# Altium PCB PDS.PcbDoc
Units mil, origin at the board's own origin, x right, y up, seen from the top; angles counter-clockwise.
Board outline 1968.5 x 1929.13 mil, 4 copper layers (L1 (Sig), L2 (GDN), L3 (GDN), L4 (Sig)), stack 59.734 mil thick; 33 components, 27 nets, 121 pads, 33 vias.
Unrouted connection lines stored in the file: 25.
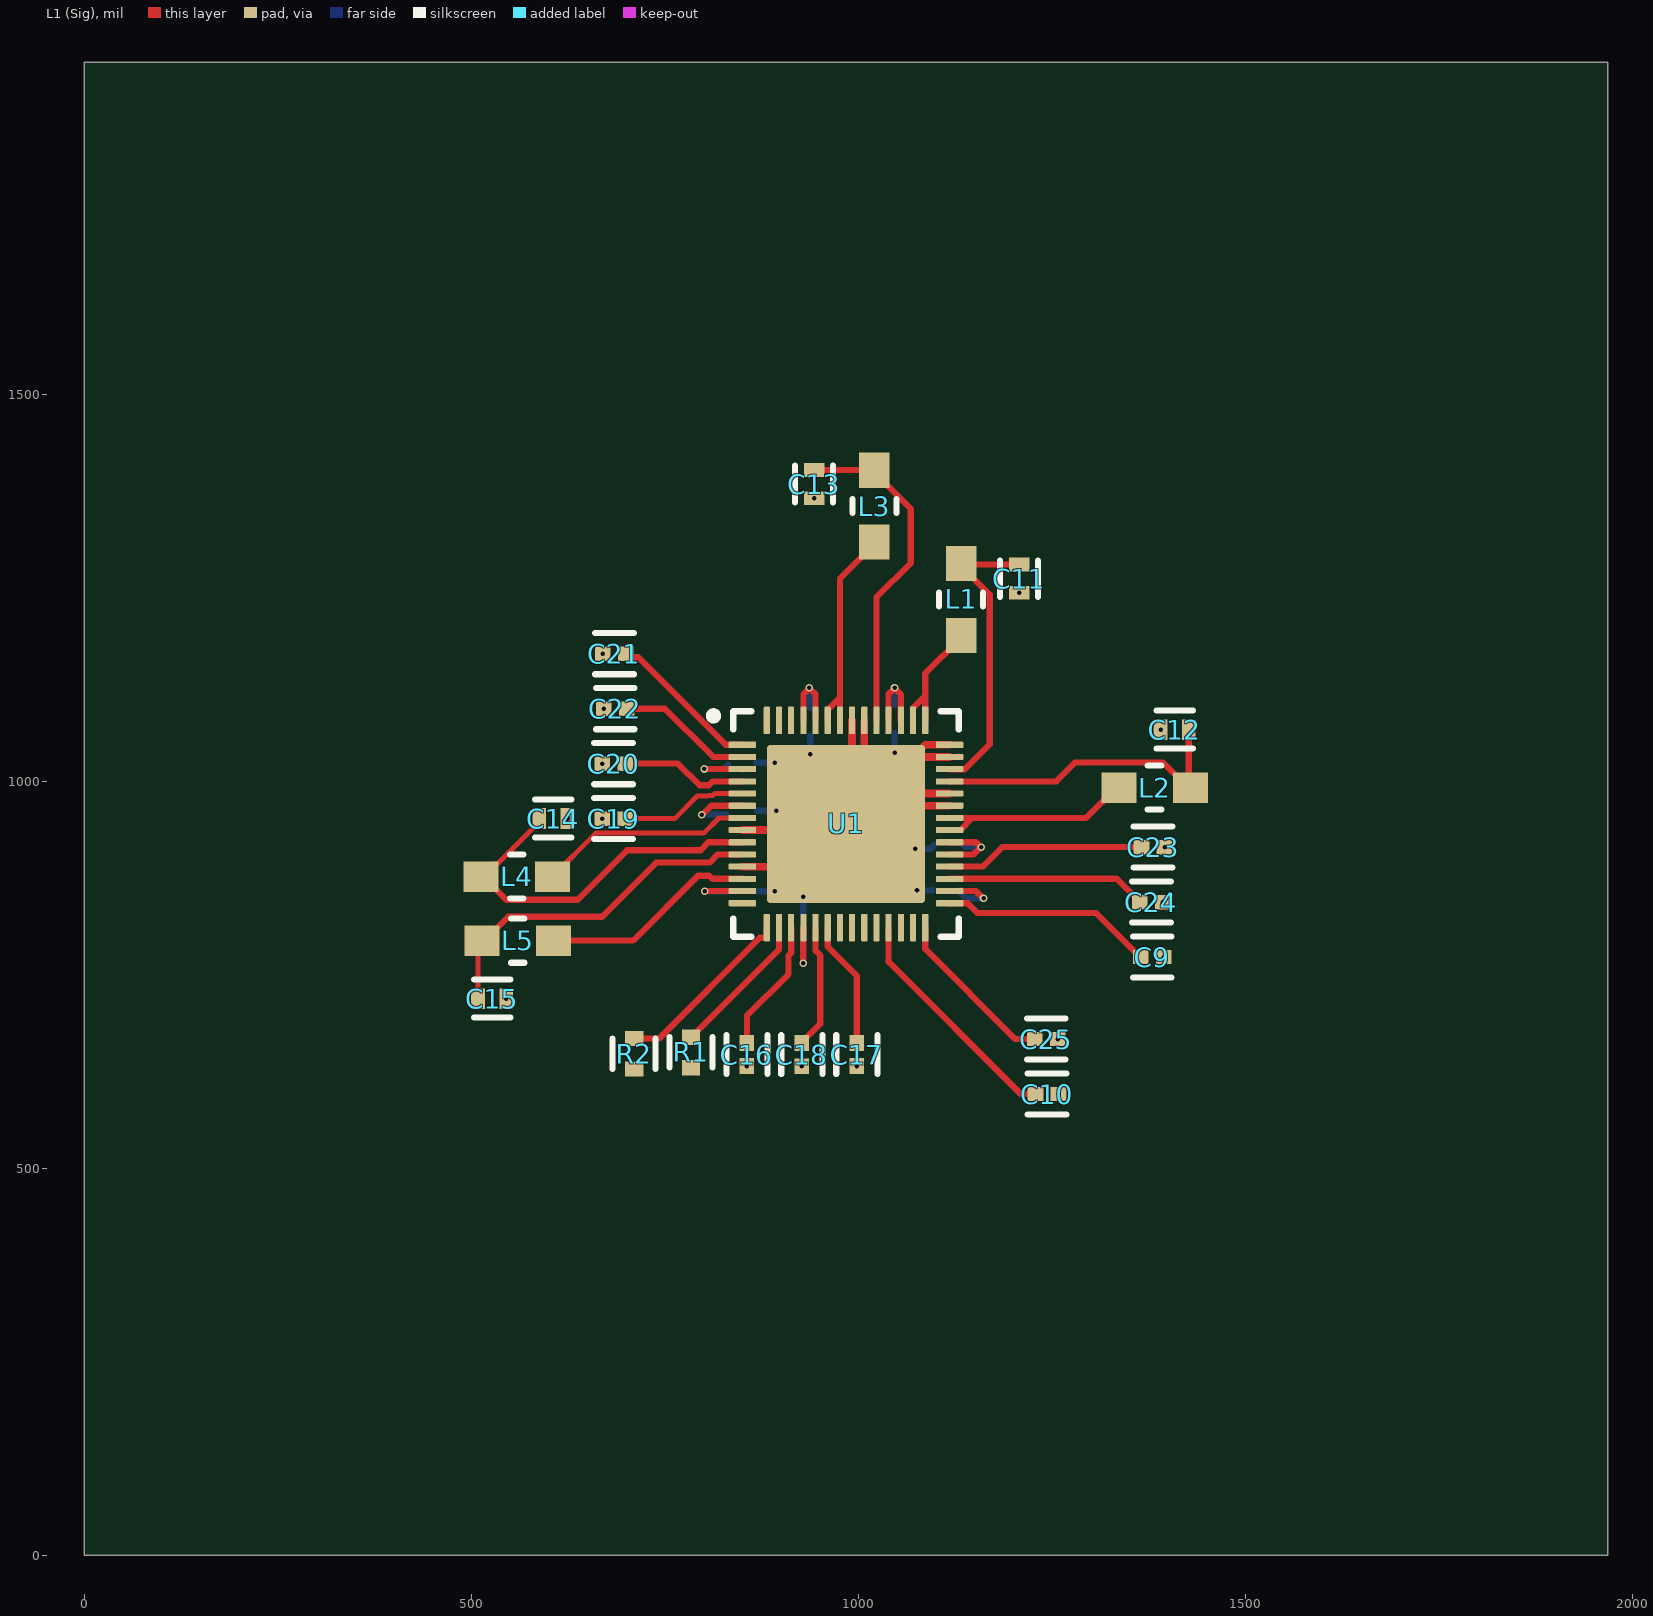
[diagram p0: L1 (Sig) view]
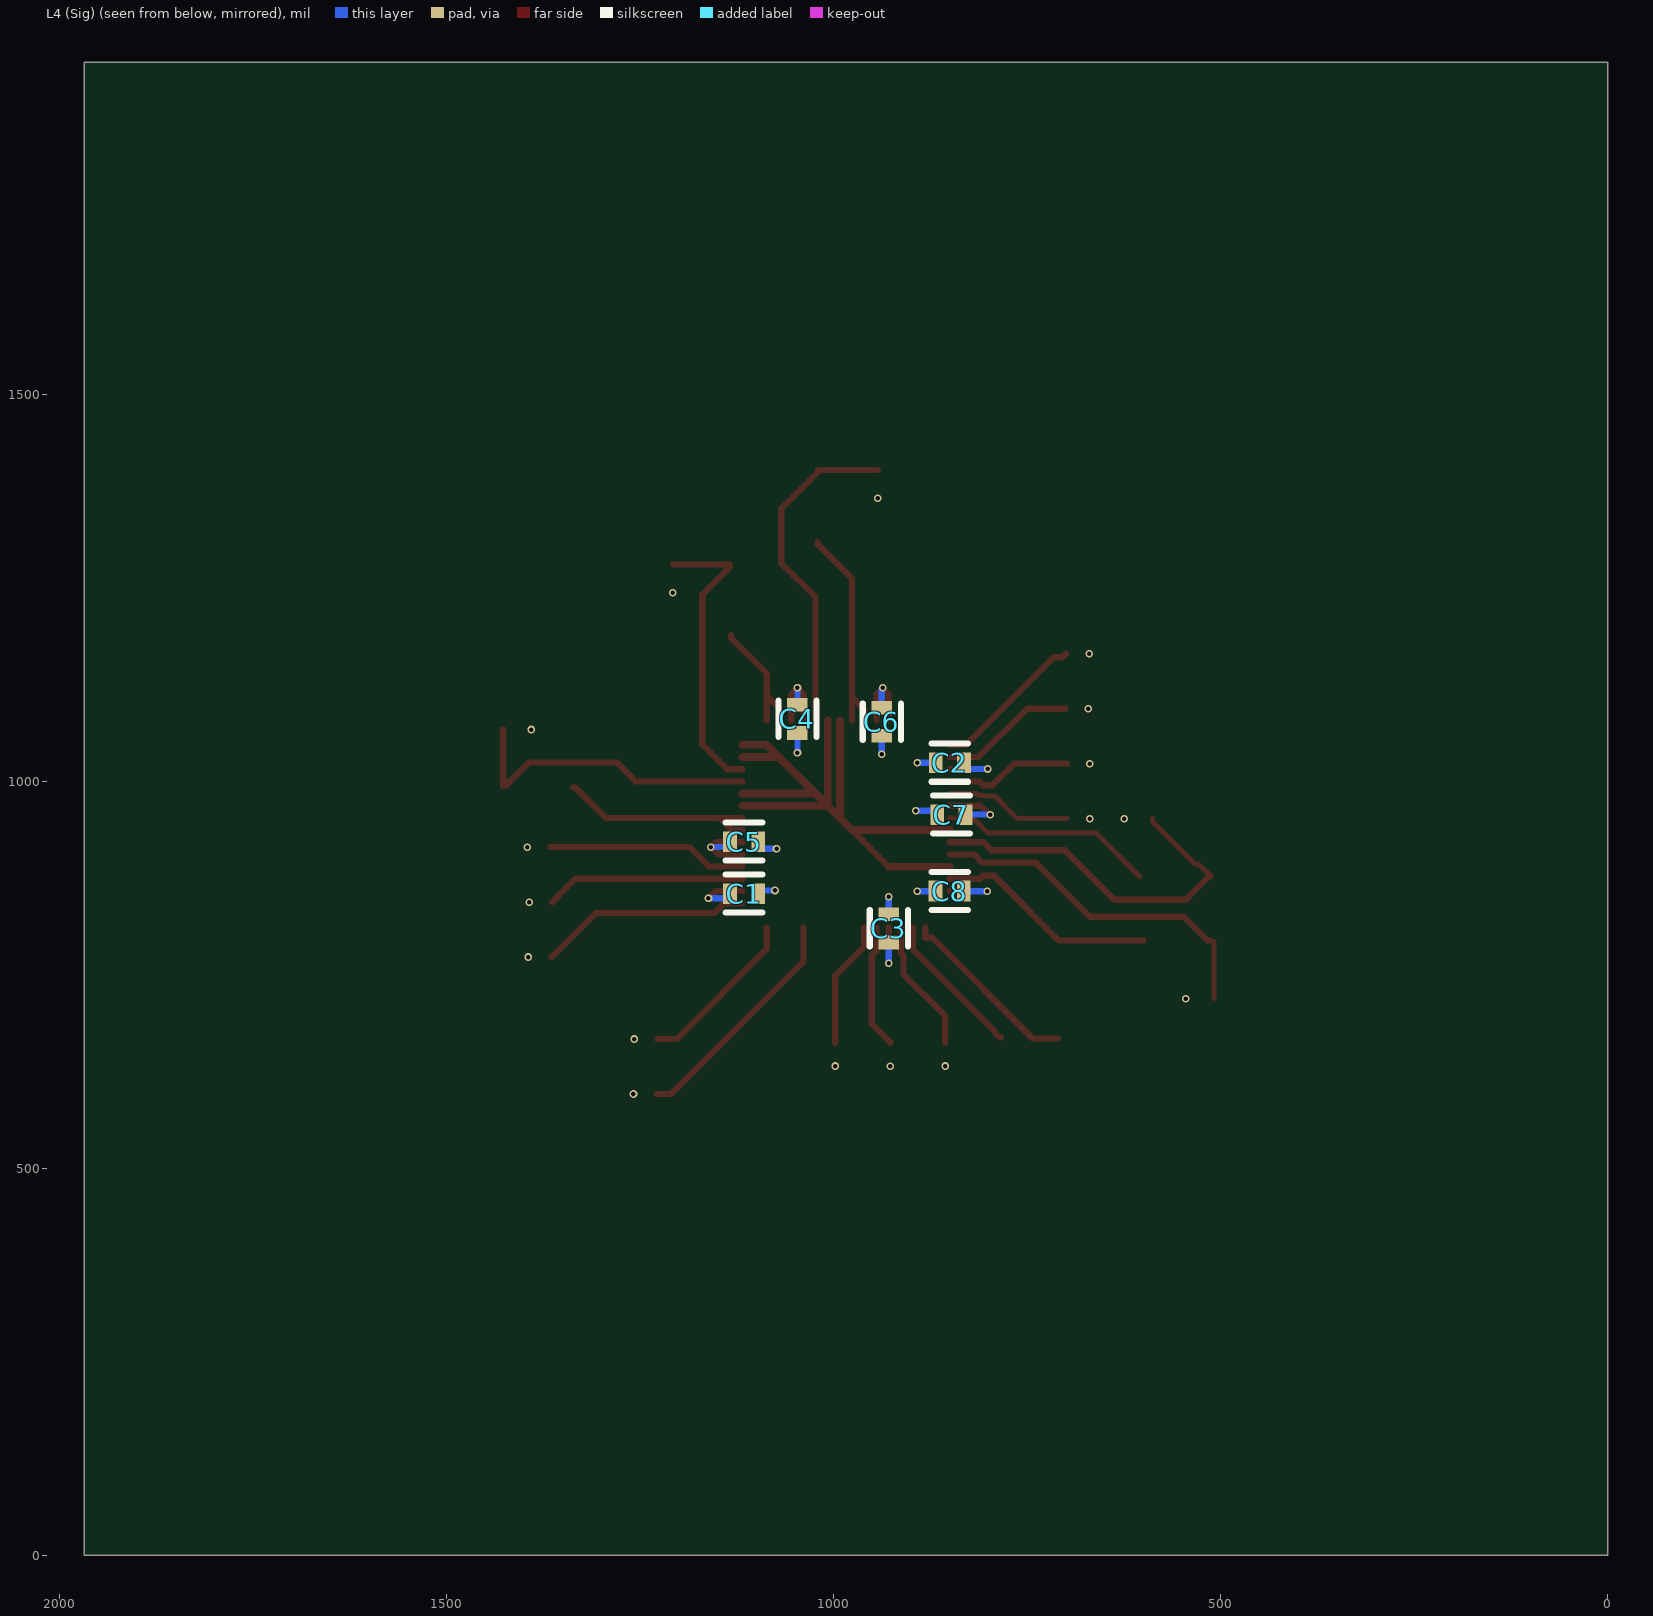
[diagram p1: L4 (Sig) view, seen from below]
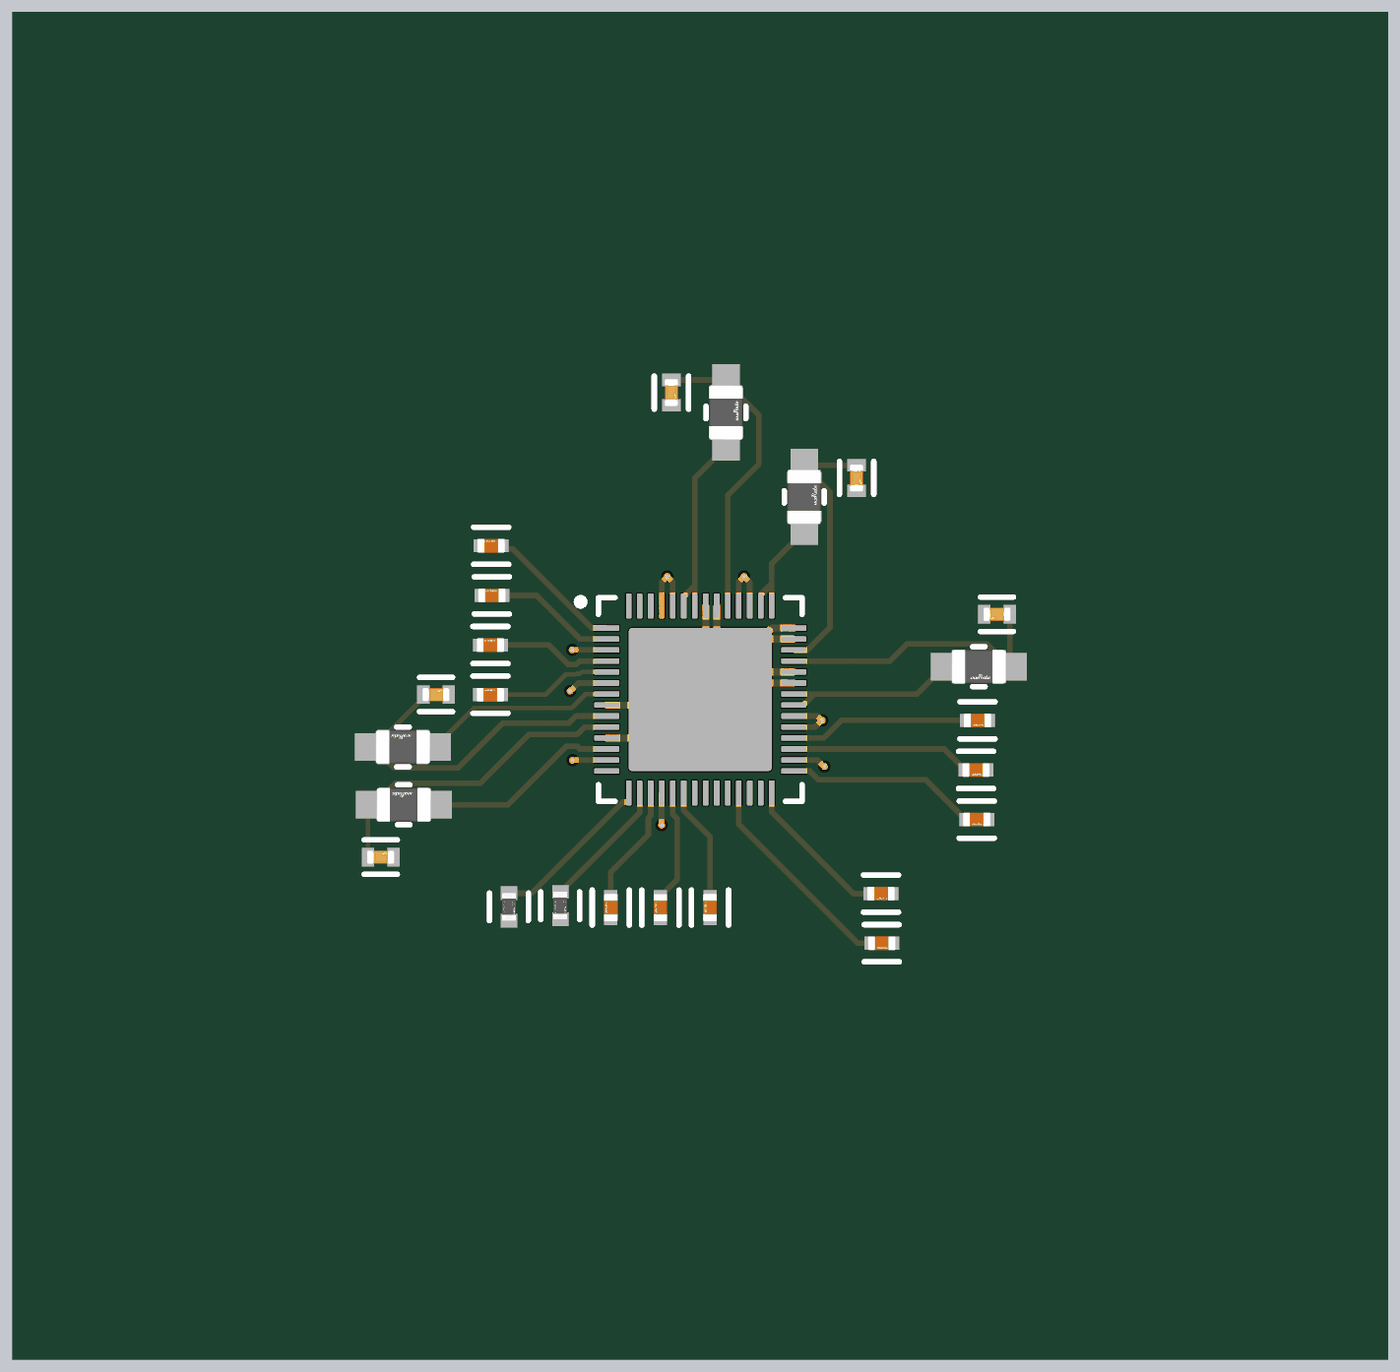
[diagram p2: 3D render of the assembled board from above, using the file's embedded part models]
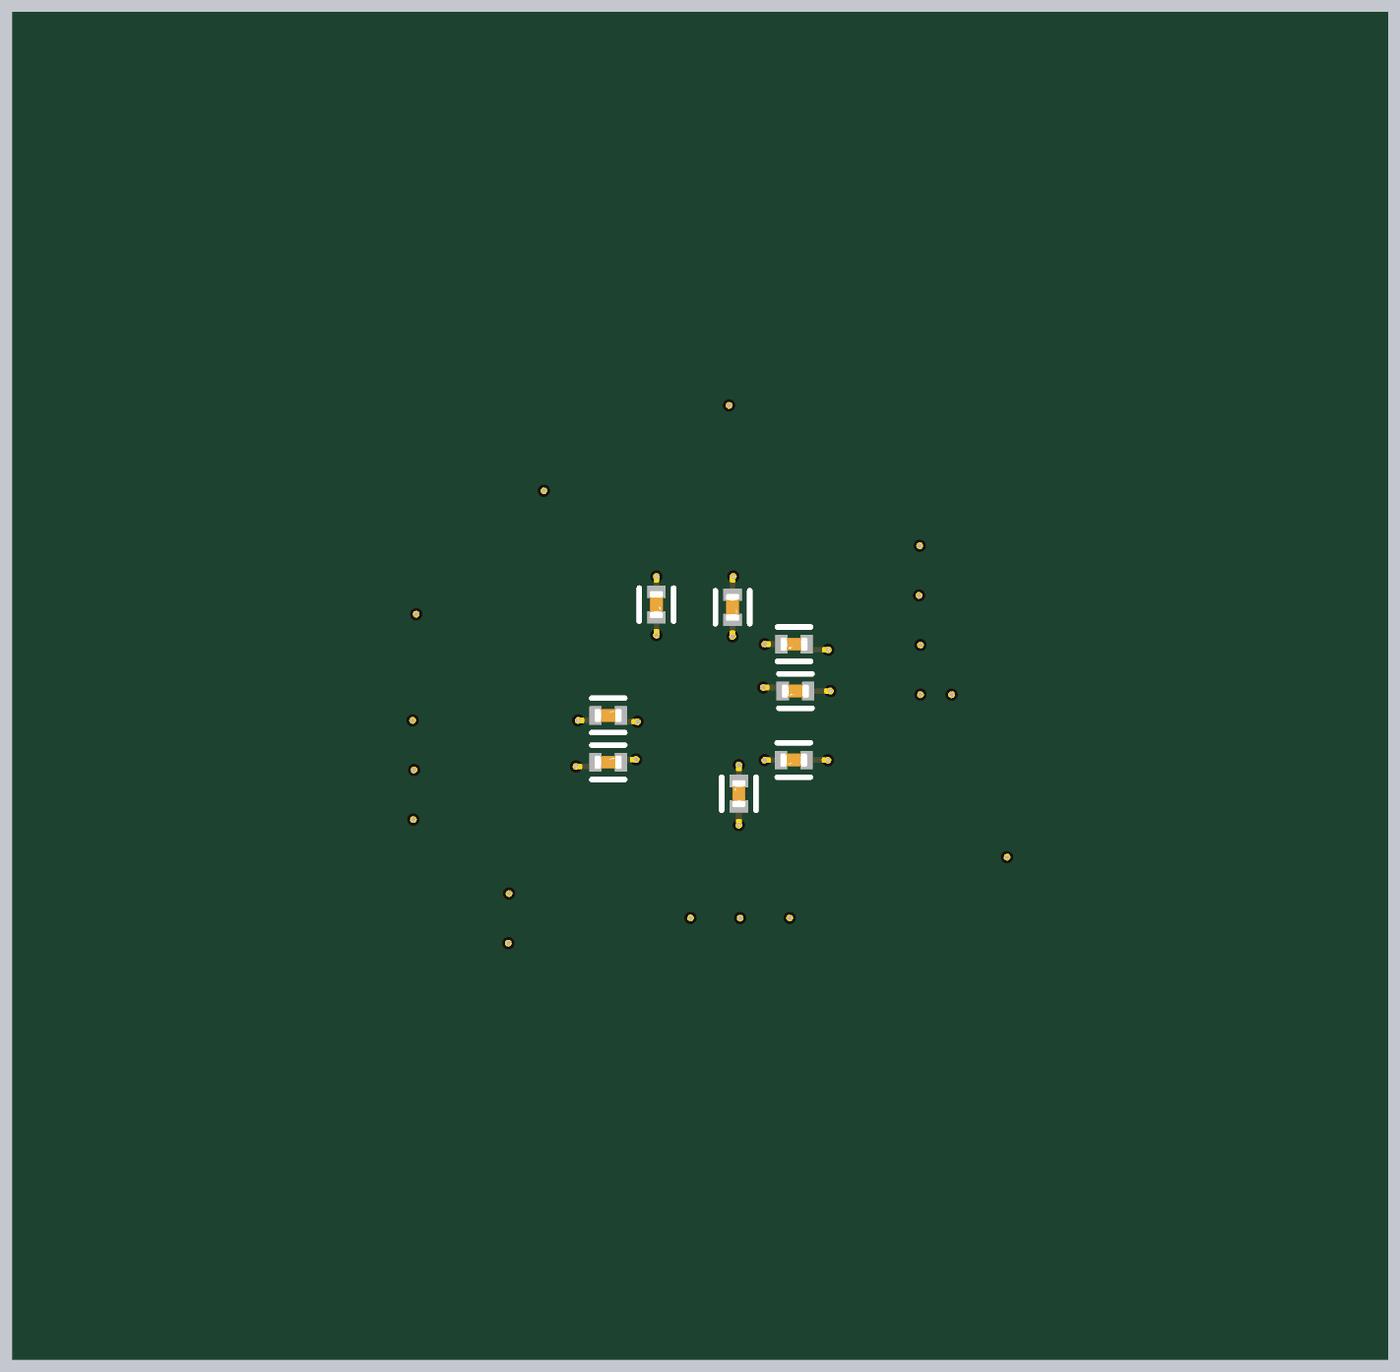
[diagram p3: 3D render of the assembled board from below, using the file's embedded part models]

## Layer stack, top to bottom
Top Solder: solder mask 1, SM-001, Dk 4
L1 (Sig): signal copper 1.378
Dielectric 1: prepreg 2.8, PP-006, Dk 4.1
L2 (GDN): signal copper 0.689
Dielectric 3: core 50, Core-039, Dk 4.8
L3 (GDN): signal copper 0.689
Dielectric 5: prepreg 2.8, PP-006, Dk 4.1
L4 (Sig): signal copper 1.378
Bottom Solder: solder mask 1, SM-001, Dk 4

## Board outline
0,0 0,1929.13 1968.5,1929.13 1968.5,0

## Design rules (kind name [scope] priority, off if disabled: settings)
Clearance [All] p1: gap=10 ignorepadtopadclearanceinfootprint=FALSE except(0: Arc-Hole Track-Hole SMDPad-Hole THPad-Hole Via-Hole Fill-Hole Poly-Hole Region-Hole Text-Hole; 6: Arc-Arc Arc-Track Arc-SMDPad Track-Track Track-SMDPad SMDPad-SMDPad)
PolygonConnect [All] p1: connectstyle=Relief reliefconductorwidth=10 reliefentries=4 polygonreliefangle="90 Angle" airgapwidth=10
RoutingVias [All] p1: holewidth=5.91 width=9.84 viastyle="Through Hole" minholewidth=5.91 minwidth=9.84 maxholewidth=5.91 maxwidth=9.84
SolderMaskExpansion [All] p1: expansion=4 istentingtop=FALSE
Width [All] p1: maxlimit=30 minlimit=6.5 preferedwidth=8
30 further rules are at their usual default settings.

## Components (designator, comment, footprint, x,y, rotation, side; value= is the part's Value field where it differs from the comment)
C1 "CL05A106MP5NUNC" FP-CL05A106MP5NUNC-MFG 1116,855 r180 bottom value=10uF
C2 "CL05A106MP5NUNC" FP-CL05A106MP5NUNC-MFG 850,1024.1 r0 bottom value=10uF
C3 "CL05A106MP5NUNC" FP-CL05A106MP5NUNC-MFG 929,810 r90 bottom value=10uF
C4 "CL05A106MP5NUNC" FP-CL05A106MP5NUNC-MFG 1047,1080.77 r270 bottom value=10uF
C5 "CL05A106MP5NUNC" FP-CL05A106MP5NUNC-MFG 1116,922.1 r180 bottom value=10uF
C6 "CL05A106MP5NUNC" FP-CL05A106MP5NUNC-MFG 938,1077 r270 bottom value=10uF
C7 "CL05A106MP5NUNC" FP-CL05A106MP5NUNC-MFG 848,957 r0 bottom value=10uF
C8 "CL05A106MP5NUNC" FP-CL05A106MP5NUNC-MFG 850.39,858.27 r0 bottom value=10uF
C9 "CL05B105KQ5NQNC" FP-CL95-IPC_C 1380,772.97 r0 top
C10 "CL05A475KP5NRNC" FP-CL828-IPC_C 1244,595.97 r0 top
C11 "CL05A106MP5NUNC" FP-CL05A106MP5NUNC-MFG 1208,1262 r270 top value=10uF
C12 "CL05A106MP5NUNC" FP-CL05A106MP5NUNC-MFG 1409,1066.94 r180 top value=10uF
C13 "CL05A106MP5NUNC" FP-CL05A106MP5NUNC-MFG 943,1384.21 r270 top value=10uF
C14 "CL05A106MP5NUNC" FP-CL05A106MP5NUNC-MFG 606.13,951.97 r0 top value=10uF
C15 "CL05A106MP5NUNC" FP-CL05A106MP5NUNC-MFG 527,719.18 r0 top value=10uF
C16 "CL05A475KP5NRNC" FP-CL828-IPC_C 856.16,647 r270 top
C17 "CL05A475KP5NRNC" FP-CL828-IPC_C 998.22,647 r270 top
C18 "CL05A475KP5NRNC" FP-CL828-IPC_C 927.19,646.9 r270 top
C19 "CL05A475KP5NRNC" FP-CL828-IPC_C 684,951.84 r180 top
C20 "CL05A475KP5NRNC" FP-CL828-IPC_C 684,1022.88 r180 top
C21 "CL05A475KP5NRNC" FP-CL828-IPC_C 685,1164.94 r180 top
C22 "CL05A475KP5NRNC" FP-CL828-IPC_C 686,1093.91 r180 top
C23 "CL05A475KP5NRNC" FP-CL828-IPC_C 1381,915.03 r0 top
C24 "CL05A475KP5NRNC" FP-CL828-IPC_C 1378.9,844 r0 top
C25 "CL05A475KP5NRNC" FP-CL828-IPC_C 1243,667 r0 top
L1 "LQM21NN1R5K10D" FP-LQM21DN_00-MFG 1133,1235 r90 top
L2 "LQM21NN1R5K10D" FP-LQM21DN_00-MFG 1383,991.97 r0 top
L3 "LQM21NN1R5K10D" FP-LQM21DN_00-MFG 1020.97,1355.74 r90 top
L4 "LQM21NN1R5K10D" FP-LQM21DN_00-MFG 558.74,877 r180 top
L5 "LQM21NN1R5K10D" FP-LQM21DN_00-MFG 560,794.16 r180 top
R1 "RT0402BRD0720KL" FP-RT0402-MFG 784,649.68 r270 top value=20KΩ
R2 "RT0402BRD0720KL" FP-RT0402-MFG 710.56,648 r270 top value=20KΩ
U1 "UQFN127P600-8N" UQFN127P600-8N 984.25,944.88 r0 top

## Footprints (in the part's own frame and the unit in brackets; to place one, negate y for a bottom-side part, rotate by r counter-clockwise, add the part's x,y. Pads: shape width x height; smd on the part's side, far side on the other; paste and mask are expansions set on the pad)
FP-CL05A106MP5NUNC-MFG [mm]
  rect 0.45x0.675 smd paste+0 mask+0: 1(-0.463,0) 2(0.463,0)
  silkscreen extent -0.6,-0.63 0.6,0.63, body extent -0.5,-0.25 0.5,0.25, height 0.7
FP-CL95-IPC_C [mil]
  rect 20.29x18.6 smd paste+0 mask+0: 1(-14.9,0) 2(14.9,0)
  silkscreen extent -25,-27 25,27, body extent -29,-15 29,15, height 10
FP-CL828-IPC_C [mil]
  rect 20.29x18.6 smd paste+0 mask+0: 1(-14.9,0) 2(14.9,0)
  silkscreen extent -25,-27 25,27, body extent -29,-15 29,15, height 10
FP-LQM21DN_00-MFG [mm]
  rect 1.15x1 smd paste+0 mask+0: 1(-1.175,0) 2(1.175,0)
  silkscreen extent -0.23,-0.72 0.23,0.72, body extent -1.85,-0.82 1.85,0.82, height 0.25
FP-RT0402-MFG [mm]
  rect 0.5x0.6 smd paste+0 mask+0: 1(-0.5,0) 2(0.5,0)
  silkscreen extent -0.5,-0.71 0.5,0.7, body extent -0.85,-0.4 0.85,0.4, height 0.25
UQFN127P600-8N [mm]
  rrect25% 0.9x0.2 smd mask+0.05: 1(-3.4,2.6) 2(-3.4,2.2) 3(-3.4,1.8) 4(-3.4,1.4) 5(-3.4,1) 6(-3.4,0.6) 7(-3.4,0.2) 8(-3.4,-0.2) 9(-3.4,-0.6) 10(-3.4,-1) 11(-3.4,-1.4) 12(-3.4,-1.8) 13(-3.4,-2.2) 14(-3.4,-2.6) 29(3.4,-2.6) 30(3.4,-2.2) 31(3.4,-1.8) 32(3.4,-1.4) 33(3.4,-1) 34(3.4,-0.6) 35(3.4,-0.2) 36(3.4,0.2) 37(3.4,0.6) 38(3.4,1) 39(3.4,1.4) 40(3.4,1.8) 41(3.4,2.2) 42(3.4,2.6)
  rrect25% 0.2x0.9 smd mask+0.05: 15(-2.6,-3.4) 16(-2.2,-3.4) 17(-1.8,-3.4) 18(-1.4,-3.4) 19(-1,-3.4) 20(-0.6,-3.4) 21(-0.2,-3.4) 22(0.2,-3.4) 23(0.6,-3.4) 24(1,-3.4) 25(1.4,-3.4) 26(1.8,-3.4) 27(2.2,-3.4) 28(2.6,-3.4) 43(2.6,3.4) 44(2.2,3.4) 45(1.8,3.4) 46(1.4,3.4) 47(1,3.4) 48(0.6,3.4) 49(0.2,3.4) 50(-0.2,3.4) 51(-0.6,3.4) 52(-1,3.4) 54(-1.8,3.4) 55(-2.2,3.4) 56(-2.6,3.4)
  rrect25% 0.2x0.9 smd paste-2539.97 mask+0.05: 53(-1.4,3.4)
  rrect5% 5.2x5.2 smd mask+0.05: 57(0,0)
  silkscreen extent -4.47,-3.7 3.7,3.7, body extent -3.55,-3.55 3.55,3.55, height 0.8

## Part data
C1 C2 C3 C4 C5 C6 C7 C8 C11 C12 C13 C14 C15: library part CMP-13271-000002-1, "CAP CER 10UF 10V X5R 0402", Capacitance=10uF, Manufacturer=Samsung, Temperature="-55°C to +85°C", Temperature Characteristic=X5R, Temperature Coefficient=15%, Temperature Range High=+85°C, Temperature Range Low=-55°C, Tolerance=20%, Voltage Rating=10V, Automotive=No, Category=Cap, ComponentLink2Description=Datasheet, ComponentLink2URL=http://www.samsungsem.com/kr/support/product-search/mlcc/__icsFiles/afieldfile/2019/05/10/19-CL05A106MP5NUNC.pdf, Device Class L1="Passive Components", Device Class L2=Capacitors, Device Class L3="Ceramic Capacitors", Digikey Description="CAP CER 10UF 10V X5R 0402", Height=0.7mm, Ipc Land Pattern Name=CAPC10050X50, Lead Free=Yes, Manufacturer Part Number=CL05A106MP5NUNC, Material=Ceramic, Octopart=https://octopart.com/cl05a106mp5nunc-samsung-22457395, Package=CL05A106MP5NUNC, RoHS=TRUE
C9: library part CMP-13271-000020-2, "Cap Ceramic 1uF 6.3V X7R ±10% SMD 0402 +125°C Paper T/R", Capacitance=1uF, Case Code (Imperial)=0402, Case Code (Metric)=1005, Dielectric=X7R, Max Operating Temperature=125°C, Min Operating Temperature=-55°C, Package Quantity=1, Tolerance=10%, Voltage Rating=6.3V, Case/Package=0402, Contact Plating=Tin, Depth=0.5mm, Lead Free="Lead Free", Length=1mm, Mount="Surface Mount", Packaging="Tape and Reel", Termination=Wraparound, Thickness=0.022inch, Width=0.02inch
C10 C16 C17 C18 C19 C20 C21 C22 C23 C24 C25: library part CMP-13271-001251-1, "Cap Ceramic 4.7uF 10V X5R ±10% SMD 0402 +85°C Paper T/R", Capacitance=4.7uF, Case Code (Imperial)=0402, Case Code (Metric)=1005, Dielectric=X5R, Max Operating Temperature=85°C, Min Operating Temperature=-55°C, Package Quantity=1, Tolerance=10%, Voltage Rating=10V, Case/Package=0402, Depth=0.5mm, Height=0.5mm, Lead Free="Lead Free", Length=1mm, Material=Ceramic, Mount="Surface Mount", Packaging="Tape and Reel", Radiation Hardening=No, Thickness=0.022inch, Width=0.02inch
L1 L2 L3 L4 L5: library part CMP-06042-016990-1, "Multilayer Type Inductor for General Circuits, 0805 (2012), 1.5μH, 10%, 0.5Ω, 50mA", Case Code (Imperial)=0805, Case Code (Metric)=2012, Current Rating=50mA, DC Resistance (DCR)=500mR, Inductance=1.5uH, Inductance Tolerance=10%, Max Operating Temperature=85°C, Min Operating Temperature=-40°C, Package Quantity=4000, Self Resonant Frequency=87MHz, Test Frequency=10MHz, Case/Package=0805, Core Material=Ferrite, DC Current=50mA, Depth=1.45mm, Height=0.85mm, Height - Seated (Max)=0.041inch, Lead Free="Lead Free", Length=2mm, Max DC Current=50mA, Military Standard=Not, Mount="Surface Mount", Packaging="Tape and Reel", Q Factor=45, Radiation Hardening=No, Rated Current-Max=50mA, REACH SVHC="No SVHC", RoHS Compliant=Yes, Series=LQM21N, Shielding=Shielded, Termination=SMD/SMT, Tolerance=10%, Width=0.049inch
R1 R2: library part CMP-2002-02936-2, "RES SMD 20K OHM 0.1% 1/16W 0402", Manufacturer=Yageo, Package=RT0402, Power Rating=0.063W, Resistance=20KΩ, Temperature="-55°C to +155°C", Temperature Coefficient="25 ppm/°C", Temperature Range High=+155°C, Temperature Range Low=-55°C, Tolerance=0.001, Voltage Rating=50V, Automotive=No, Category=Res, ComponentLink2Description=Datasheet, ComponentLink2URL=http://www.yageo.com/documents/recent/PYu-RT_1-to-0.01_RoHS_L_9.pdf, Composition="Thin Film", Device Class L1="Passive Components", Device Class L2=Resistors, Device Class L3="Chip SMD Resistors", Digikey Description="RES SMD 20K OHM 0.1% 1/16W 0402", Footprint Url=http://www.yageo.com/exep/pages/download/literatures/PYu-R_Mount_10.pdf, Height=0.35mm, Ipc Land Pattern Name=RESC10050X30, Lead Free=Yes, Manufacturer Part Number=RT0402BRD0720KL, Mouser Description="Res Thin Film 0402 20K Ohm 0.1% 1/16W ±25ppm/°C Molded SMD SMD Paper T/R", Octopart=https://octopart.com/rt0402brd0720kl-yageo-1422805, RoHS=TRUE, Series=RT

## Via types
v1: diameter 9.84, hole 5.91, L1 (Sig) to L4 (Sig), 33 vias

## Nets (pads, with @x,y where several pads share a name; then routed paths per layer and width w, separated by ;. In a path a pad name is that pad's centre, name@x,y a point inside that pad or via, vN(x,y) a via of type N, cw(c..) or ccw(c..) an arc to the next point about the centre after c; other vN are vias at no path point)
+5: C1.1 C2.1 C3.1 C4.1 C5.1 C6.1 C7.1 C8.1 U1.3 U1.6 U1.13 U1.18 U1.30 U1.33 U1.34 U1.45 U1.46 U1.52 U1.53 | length 752
  L1 (Sig) w8: v1(798,957) 798.5,957 810,968.5 U1.6 ; v1(801,1016) 801.19,1015.81 850.33,1015.81 U1.3 ; v1(801.5,858) 801.7,858.2 850.33,858.2 U1.13 ; v1(929,765) 929.07,765.07 U1.18 U1.18 ; U1.53 929.13,1112.64 v1@937,1120.5 ; v1(937,1121) v1@937,1120.5 ; U1.52 944.88,1112.62 v1@937,1120.5 ; U1.46 1039.37,1112.87 v1@1047,1120.5 ; v1(1047,1121) v1@1047,1120.5 ; U1.45 1055.12,1112.38 v1@1047,1120.5 ; U1.30 1152.23,858.27 1161.5,849 v1(1162,849) ; U1.33 1149.01,905.51 v1@1158.5,915 ; U1.34 1152.24,921.26 v1@1158.5,915 ; v1(1159,915) v1@1158.5,915
  L4 (Sig) w8: v1(798,957) C7.1 ; v1(801,1016) 826.93,1016 831.79,1020.86 C2.1@831.79,1021.67 ; v1(801.5,858) 831.92,858 C8.1 ; v1(929,765) C3.1 ; v1(937,1121) 937,1120.5 938,1119.5 C6.1 ; C4.1 v1(1047,1121) ; C1.1@1132.32,859.27 1132.32,855.75 1139.07,849 v1(1162,849) ; C5.1@1135.21,919.86 1135.21,918.86 1139.07,915 v1(1159,915)
DCDCA: C11.1 L1.2 U1.40 | length 386.3
  L1 (Sig) w8: U1.40 1137.75,1015.75 1170,1048 1170,1241.31 1134.05,1277.26 1134.05,1280.21 C11.1
DCDCB: C12.1 L2.2 U1.39 | length 404.8
  L1 (Sig) w8: U1.39 1256,1000 1280.45,1024.45 1393.83,1024.45 1424.26,994.02 1427.21,994.02 C12.1
DCDCC: C13.1 L3.2 U1.47 | length 439.3
  L1 (Sig) w8: C13.1 1020.55,1402.42 1020.55,1399.46 1068,1352.02 1068,1282 1023.62,1237.62 U1.47
DCDCD: C14.1 L4.2 U1.9 | length 490.2
  L1 (Sig) w6.5: L4.2 528.92,893.44 533.81,893.44 587.92,947.54 C14.1
  L1 (Sig) w8: L4.2 515.43,877 545.43,847 637.31,847 701.31,911 796.26,911 806.52,921.26 U1.9
DCDCE: C15.1 L5.2 U1.10 | length 456.7
  L1 (Sig) w6.5: C15.1 L5.2@508.79,793.1
  L1 (Sig) w8: L5.2 516.69,794.16 547.54,825 669,825 739,895 808,895 818.51,905.51 U1.10
GND: C1.2 C2.2 C3.2 C4.2 C5.2 C6.2 C7.2 C8.2 C9.2 C10.2 C11.2 C12.2 C13.2 C14.2 C15.2 C16.2 C17.2 C18.2 C19.2 C20.2 C21.2 C22.2 C23.2 C24.2 C25.2 U1.8 U1.11 U1.37 U1.38 U1.41 U1.42 U1.48 U1.49 U1.57 | length 1138.2
  L1 (Sig) w6.5: C14.2 v1(624.49,951.81)
  L1 (Sig) w8: U1.57@929.13,889.76 U1.57@976.38,937.01
  L1 (Sig) w10: U1.11 U1.57@929.13,889.76 ; U1.8 976.38,937.01 U1.57@992.13,952.76 ; U1.49 U1.57@992.13,952.76 ; U1.48 1007.87,968.5 U1.57@992.13,952.76 ; U1.37 1007.94,968.5 U1.57@1023.69,984.25 ; U1.38 U1.57@1023.69,984.25 ; U1.41 U1.57@1070.93,1031.5 ; U1.42 1086.68,1047.24 U1.57@1070.93,1031.5 ; U1.57@1023.69,984.25 U1.57@1070.93,1031.5
  L4 (Sig) w8: C2.2 868.31,1024 v1(892,1024) ; C8.2 868.87,858 v1(892,858) ; C7.2@869.4,962 v1@893.5,962 ; C3.2 v1(929,851) ; v1(938,1035) C6.2 ; v1(1047,1037) C4.2 ; v1(1074,913) 1093.93,913 1098.79,917.86 C5.2@1098.79,918.57 ; v1(1076,859) 1095.63,859 C1.2@1095.9,859.27
  other v1: 1258.9,595.97 856.16,632.1 927.19,632 998.22,632.1 1257.9,667 545.21,719.18 1394.9,772.97 1393.81,844 1395.9,915.03 669.1,951.84 894,962 669.1,1022.88 1390.79,1066.94 671.1,1093.91 670.1,1164.94 1208,1243.79 943,1366
NetC9_1: C9.1 U1.29 | length 275.8
  L1 (Sig) w8: U1.29 1141.48,842.52 1154,830 1307.22,830 1364.25,772.97 C9.1
NetC10_1: C10.1 U1.25 | length 304.8
  L1 (Sig) w8: U1.25 1039.37,766.63 1210.03,595.97 C10.1
NetC16_1: C16.1 U1.17 | length 172.8
  L1 (Sig) w8: C16.1 856.16,697.16 910,751 910,775 913.39,778.39 U1.17
NetC17_1: C17.1 U1.20 | length 164.7
  L1 (Sig) w8: U1.20 960.69,810.96 960.69,786.31 998.22,748.78 C17.1
NetC18_1: C18.1 U1.19 | length 161.6
  L1 (Sig) w8: C18.1 927.19,662.65 951,686.46 951,775 944.88,781.12 U1.19
NetC19_1: C19.1 U1.5 | length 162.7
  L1 (Sig) w6.5: C19.1 762.84,951.84 792,981 805.1,981 ; 807.33,981.75 812.25,981.75 814.75,984.25 U1.5 U1.5@850.14,984
NetC20_1: C20.1 U1.4 | length 165.1
  L1 (Sig) w8: C20.1 767.12,1022.88 795,995 807,995 812,1000 U1.4
NetC21_1: C21.1 U1.1 | length 199.2
  L1 (Sig) w8: C21.1 704.54,1160.31 715.69,1160.31 828.76,1047.24 U1.1
NetC22_1: C22.1 U1.2 | length 175.3
  L1 (Sig) w8: C22.1 750.09,1093.91 812.5,1031.5 U1.2
NetC23_1: C23.1 U1.32 | length 258.5
  L1 (Sig) w8: U1.32 1160.76,889.76 1186.03,915.03 C23.1
NetC24_1: C24.1 U1.31 | length 258.8
  L1 (Sig) w8: U1.31 1333.98,874.02 1357.86,850.14 1357.86,849.3 1363.16,844 C24.1
NetC25_1: C25.1 U1.28 | length 217.3
  L1 (Sig) w8: U1.28 1086.61,783.39 1203,667 C25.1
NetL1_1: L1.1 U1.43 U1.44 | length 167.6
  L1 (Sig) w8: U1.44 1070.87,1094.87 1086.61,1110.61 ; U1.43 1086.61,1110.61 ; L1.1 1133,1185.79 1086.61,1139.4 1086.61,1110.61
NetL2_1: L2.1 U1.35 U1.36 | length 270.8
  L1 (Sig) w8: U1.35 1131.76,937.01 1147.51,952.76 ; U1.36 1147.51,952.76 ; L2.1 1333.79,991.97 1294.57,952.76 1147.51,952.76
NetL3_1: L3.1 U1.50 U1.51 | length 285.1
  L1 (Sig) w8: U1.51 960.63,1092.39 976.38,1108.14 ; U1.50 976.38,1108.14 ; L3.1 1020.97,1306.53 976.38,1261.94 976.38,1108.14
NetL4_1: L4.1 U1.7 | length 276.8
  L1 (Sig) w6.5: L4.1 661,933 800.38,933 820.13,952.76 U1.7
NetL5_1: L5.1 U1.12 | length 286.5
  L1 (Sig) w8: L5.1@600.26,794.16 709.16,794.16 793,878 807.59,878 811.57,874.02 U1.12
NetR1_1: R1.1 U1.16 | length 189.6
  L1 (Sig) w8: R1.1@784.33,669.37 785.97,669.37 791.81,675.21 791.81,676.85 897.64,782.68 U1.16
NetR2_1: R2.1 U1.15 | length 238.4
  L1 (Sig) w8: R2.1 742.68,667.68 872.89,797.89 881.83,797.89 881.89,797.95 U1.15
Vccio: R1.2 R2.2
pads on no net: U1.14 U1.21 U1.22 U1.23 U1.24 U1.26 U1.27 U1.54 U1.55 U1.56

## Silkscreen, mask and mechanical layers (free items; w line width, h text height)
Mechanical 1:
  the board outline again, w10